# EAGLE board white_line_multi (EAGLE 9.5.1)
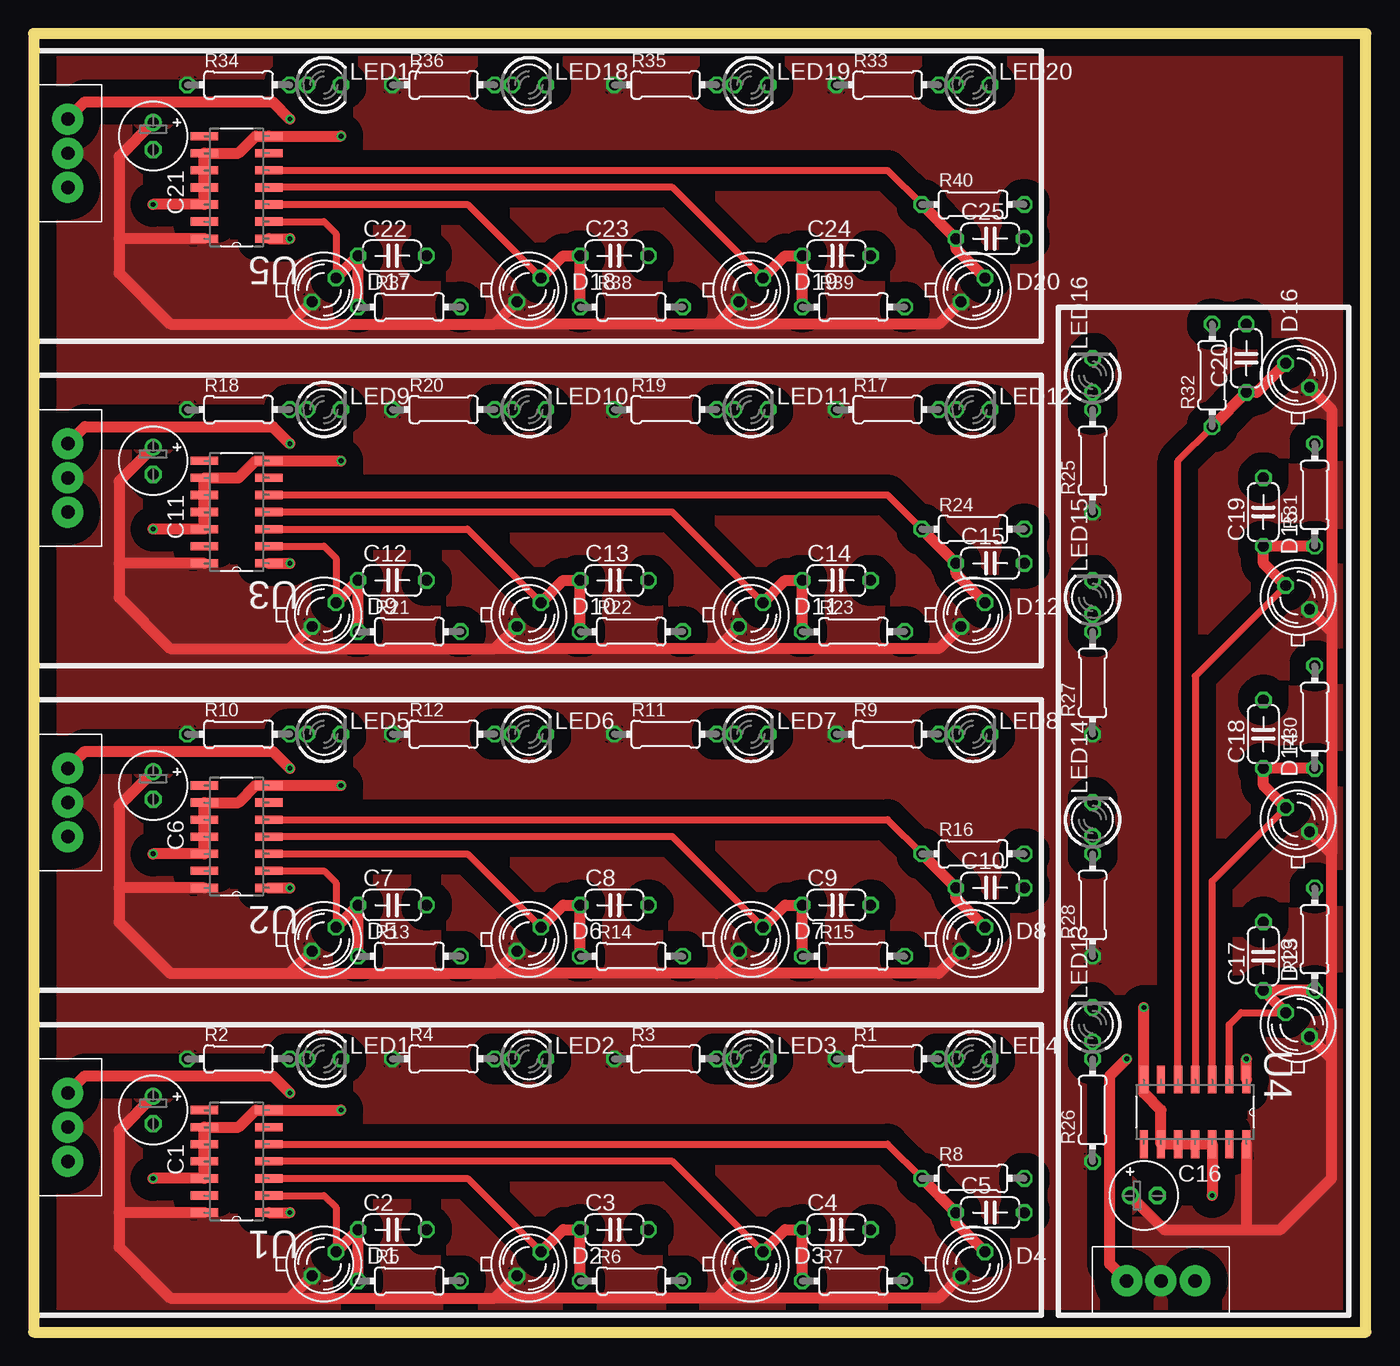
[diagram p0: board, top side]
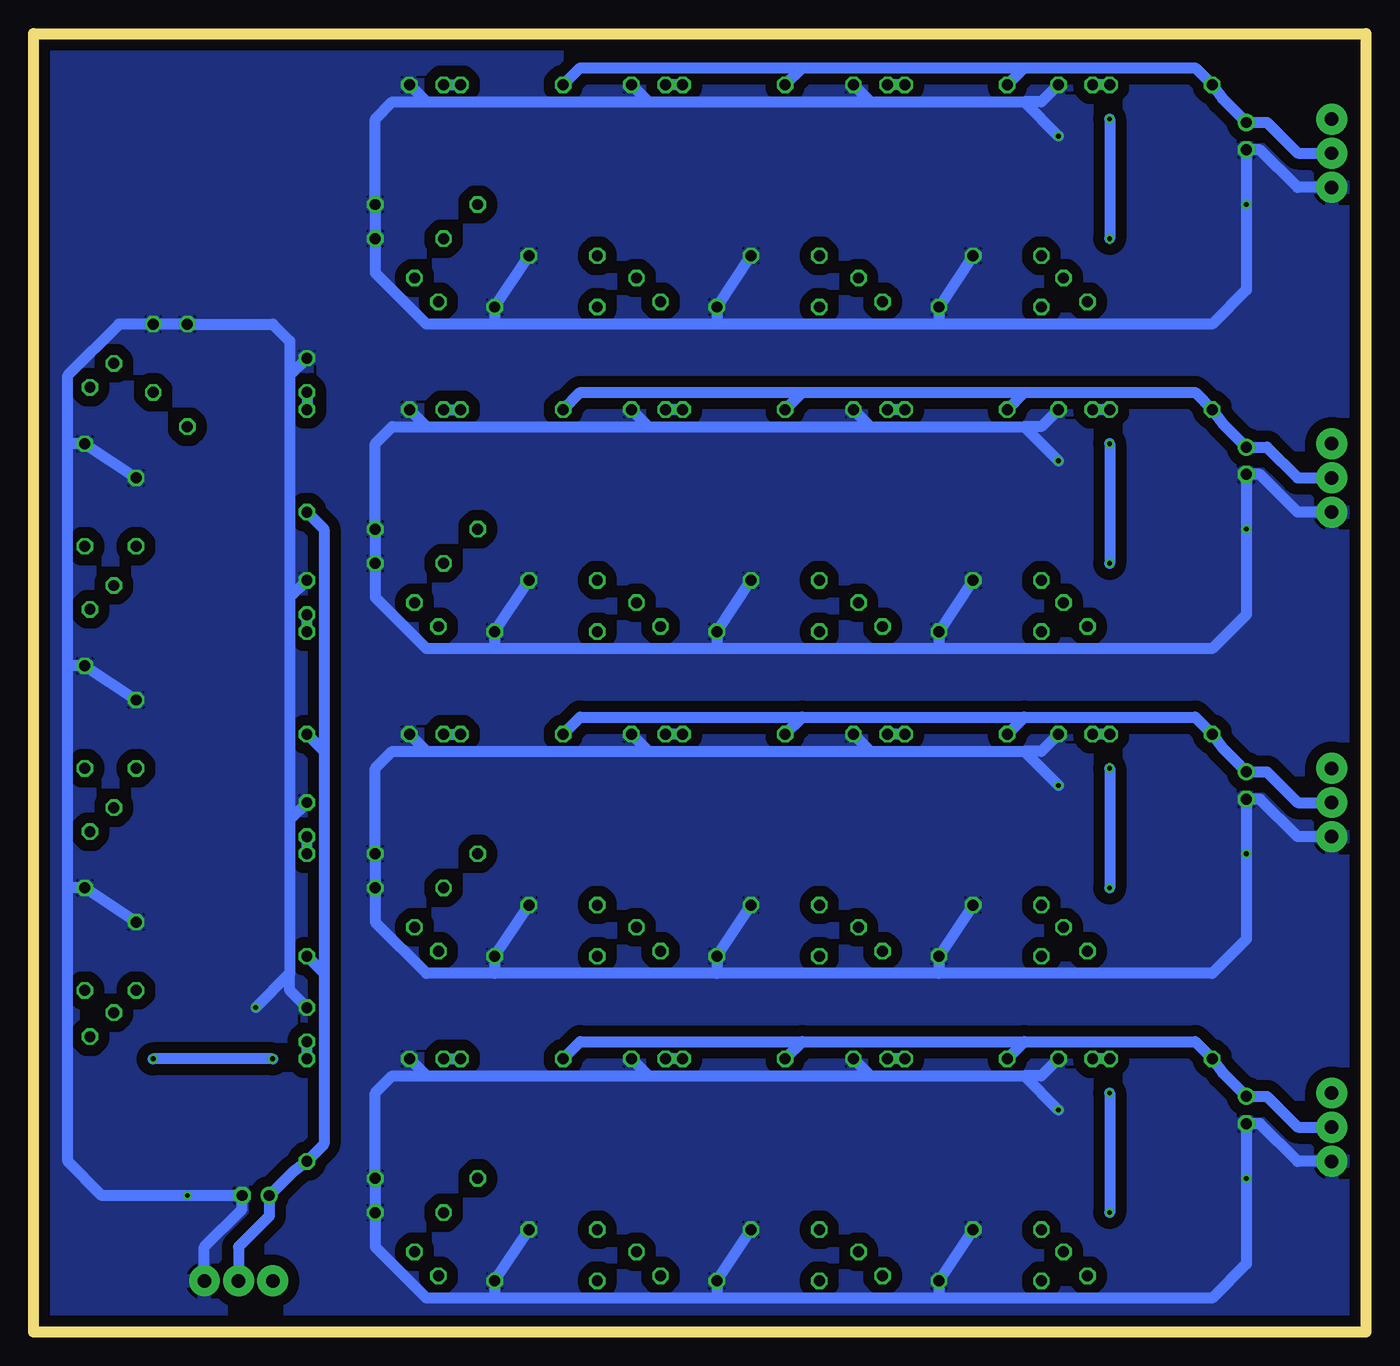
[diagram p1: board, bottom side, seen from below]

Size 99.06 x 96.52 mm. Coordinates in mm from the lower left corner, seen from the top.
Outline: 0,96.52 0,0 99.06,0 99.06,96.52 0,96.52
Copper layers (1*16): Top 0.035mm / dielectric 1.6mm / Bottom 0.035mm
Design rules "Elecrow_2-layer_PCB_eagle_rule": minimum track width 6mil, minimum drill 12mil, track to track 6mil, track to pad 6mil, pad to pad 6mil, via to via 8mil, smd to smd 0mil, copper to edge 20mil, drill to drill 10mil, minimum pad ring 6mil, minimum via ring 6mil, stop-mask expansion 0mil, vias tented up to drill 100mil, thermal gap 10mil

## Footprints (pad centres in the part's own frame; a part is rotated, then mirrored left to right if it is on the bottom)
3PIN = drill 1 pad 2.3: P$1 0,0; P$2 2.54,0; P$3 5.08,0
E2-5 = drill 0.813 pad 1.27: + -1.016,0 | drill 0.813 pad 1.27 octagon: - 1.016,0
C050-024X044 = drill 0.813 octagon: 1 -2.54,0; 2 2.54,0
BPX65 = drill 0.813 octagon: A -0.889,-0.889; K 0.889,0.889
LED3MM = drill 0.813 octagon: A -1.27,0; K 1.27,0
0204/7 = drill 0.813 octagon: 1 -3.81,0; 2 3.81,0
SOIC127P600X175-14N = smd 2.057 x 0.61: 1 -4.801,7.62; 2 -4.801,6.35; 3 -4.801,5.08; 4 -4.801,3.81; 5 -4.801,2.54; 6 -4.801,1.27; 7 -4.801,0; 8 0,0; 9 0,1.27; 10 0,2.54; 11 0,3.81; 12 0,5.08; 13 0,6.35; 14 0,7.62

## Placement (x,y rotation side)
3PIN1  3PIN  [3PIN]  2.54,41.91 270 top
3PIN2  3PIN  [3PIN]  2.54,17.78 270 top
3PIN3  3PIN  [3PIN]  2.54,66.04 270 top
3PIN4  3PIN  [3PIN]  81.28,3.81 0 top
3PIN5  3PIN  [3PIN]  2.54,90.17 270 top
C1  [E2-5]  8.89,16.51 270 top
C2  [C050-024X044]  26.67,7.62 0 top
C3  [C050-024X044]  43.18,7.62 0 top
C4  [C050-024X044]  59.69,7.62 0 top
C5  [C050-024X044]  71.12,8.89 0 top
C6  [E2-5]  8.89,40.64 270 top
C7  [C050-024X044]  26.67,31.75 0 top
C8  [C050-024X044]  43.18,31.75 0 top
C9  [C050-024X044]  59.69,31.75 0 top
C10  [C050-024X044]  71.12,33.02 0 top
C11  [E2-5]  8.89,64.77 270 top
C12  [C050-024X044]  26.67,55.88 0 top
C13  [C050-024X044]  43.18,55.88 0 top
C14  [C050-024X044]  59.69,55.88 0 top
C15  [C050-024X044]  71.12,57.15 0 top
C16  [E2-5]  82.55,10.16 0 top
C17  [C050-024X044]  91.44,27.94 90 top
C18  [C050-024X044]  91.44,44.45 90 top
C19  [C050-024X044]  91.44,60.96 90 top
C20  [C050-024X044]  90.17,72.39 90 top
C21  [E2-5]  8.89,88.9 270 top
C22  [C050-024X044]  26.67,80.01 0 top
C23  [C050-024X044]  43.18,80.01 0 top
C24  [C050-024X044]  59.69,80.01 0 top
C25  [C050-024X044]  71.12,81.28 0 top
D1  BPX65  [BPX65]  21.59,5.08 0 top
D2  BPX65  [BPX65]  36.83,5.08 0 top
D3  BPX65  [BPX65]  53.34,5.08 0 top
D4  BPX65  [BPX65]  69.85,5.08 0 top
D5  BPX65  [BPX65]  21.59,29.21 0 top
D6  BPX65  [BPX65]  36.83,29.21 0 top
D7  BPX65  [BPX65]  53.34,29.21 0 top
D8  BPX65  [BPX65]  69.85,29.21 0 top
D9  BPX65  [BPX65]  21.59,53.34 0 top
D10  BPX65  [BPX65]  36.83,53.34 0 top
D11  BPX65  [BPX65]  53.34,53.34 0 top
D12  BPX65  [BPX65]  69.85,53.34 0 top
D13  BPX65  [BPX65]  93.98,22.86 90 top
D14  BPX65  [BPX65]  93.98,38.1 90 top
D15  BPX65  [BPX65]  93.98,54.61 90 top
D16  BPX65  [BPX65]  93.98,71.12 90 top
D17  BPX65  [BPX65]  21.59,77.47 0 top
D18  BPX65  [BPX65]  36.83,77.47 0 top
D19  BPX65  [BPX65]  53.34,77.47 0 top
D20  BPX65  [BPX65]  69.85,77.47 0 top
LED1  [LED3MM]  21.59,20.32 0 top
LED2  [LED3MM]  36.83,20.32 0 top
LED3  [LED3MM]  53.34,20.32 0 top
LED4  [LED3MM]  69.85,20.32 0 top
LED5  [LED3MM]  21.59,44.45 0 top
LED6  [LED3MM]  36.83,44.45 0 top
LED7  [LED3MM]  53.34,44.45 0 top
LED8  [LED3MM]  69.85,44.45 0 top
LED9  [LED3MM]  21.59,68.58 0 top
LED10  [LED3MM]  36.83,68.58 0 top
LED11  [LED3MM]  53.34,68.58 0 top
LED12  [LED3MM]  69.85,68.58 0 top
LED13  [LED3MM]  78.74,22.86 90 top
LED14  [LED3MM]  78.74,38.1 90 top
LED15  [LED3MM]  78.74,54.61 90 top
LED16  [LED3MM]  78.74,71.12 90 top
LED17  [LED3MM]  21.59,92.71 0 top
LED18  [LED3MM]  36.83,92.71 0 top
LED19  [LED3MM]  53.34,92.71 0 top
LED20  [LED3MM]  69.85,92.71 0 top
R1  [0204/7]  63.5,20.32 0 top
R2  [0204/7]  15.24,20.32 0 top
R3  [0204/7]  46.99,20.32 0 top
R4  [0204/7]  30.48,20.32 0 top
R5  [0204/7]  27.94,3.81 0 top
R6  [0204/7]  44.45,3.81 0 top
R7  [0204/7]  60.96,3.81 0 top
R8  [0204/7]  69.85,11.43 0 top
R9  [0204/7]  63.5,44.45 0 top
R10  [0204/7]  15.24,44.45 0 top
R11  [0204/7]  46.99,44.45 0 top
R12  [0204/7]  30.48,44.45 0 top
R13  [0204/7]  27.94,27.94 0 top
R14  [0204/7]  44.45,27.94 0 top
R15  [0204/7]  60.96,27.94 0 top
R16  [0204/7]  69.85,35.56 0 top
R17  [0204/7]  63.5,68.58 0 top
R18  [0204/7]  15.24,68.58 0 top
R19  [0204/7]  46.99,68.58 0 top
R20  [0204/7]  30.48,68.58 0 top
R21  [0204/7]  27.94,52.07 0 top
R22  [0204/7]  44.45,52.07 0 top
R23  [0204/7]  60.96,52.07 0 top
R24  [0204/7]  69.85,59.69 0 top
R25  [0204/7]  78.74,64.77 90 top
R26  [0204/7]  78.74,16.51 90 top
R27  [0204/7]  78.74,48.26 90 top
R28  [0204/7]  78.74,31.75 90 top
R29  [0204/7]  95.25,29.21 90 top
R30  [0204/7]  95.25,45.72 90 top
R31  [0204/7]  95.25,62.23 90 top
R32  [0204/7]  87.63,71.12 90 top
R33  [0204/7]  63.5,92.71 0 top
R34  [0204/7]  15.24,92.71 0 top
R35  [0204/7]  46.99,92.71 0 top
R36  [0204/7]  30.48,92.71 0 top
R37  [0204/7]  27.94,76.2 0 top
R38  [0204/7]  44.45,76.2 0 top
R39  [0204/7]  60.96,76.2 0 top
R40  [0204/7]  69.85,83.82 0 top
U1  CD4072BM  [SOIC127P600X175-14N]  12.7,16.51 180 top
U2  CD4072BM  [SOIC127P600X175-14N]  12.7,40.64 180 top
U3  CD4072BM  [SOIC127P600X175-14N]  12.7,64.77 180 top
U4  CD4072BM  [SOIC127P600X175-14N]  82.55,13.97 270 top
U5  CD4072BM  [SOIC127P600X175-14N]  12.7,88.9 180 top

## Library data of the parts
3PIN1-3PIN5 = 3PIN_2
C1-C25 = rcl; SPICEPREFIX: C
D1-D20 = opto-trans-siemens; MPN: BPX65.; OC_FARNELL: 327451; OC_NEWARK: 06WX2764
LED1-LED20 = led
R1-R40 = rcl; SPICEPREFIX: R
U1-U5 = CD4072BM; AVAILABILITY: Unavailable; DESCRIPTION: CMOS Dual 4-Input OR Gate 14-SOIC -55 to 125; MF: Texas Instruments; MP: CD4072BM; PACKAGE: SOIC-14 Texas Instruments; PRICE: None

## Nets
A: C2.1 D1.K R5.1 U1.2
A1: C7.1 D5.K R13.1 U2.2
A2: C12.1 D9.K R21.1 U3.2
A3: C17.1 D13.K R29.1 U4.2
A4: C22.1 D17.K R37.1 U5.2
B: C3.1 D2.K R6.1 U1.3
B1: C8.1 D6.K R14.1 U2.3
B2: C13.1 D10.K R22.1 U3.3
B3: C18.1 D14.K R30.1 U4.3
B4: C23.1 D18.K R38.1 U5.3
C: C4.1 D3.K R7.1 U1.4
C1: C9.1 D7.K R15.1 U2.4
C2: C14.1 D11.K R23.1 U3.4
C3: C19.1 D15.K R31.1 U4.4
C4: C24.1 D19.K R39.1 U5.4
D: C5.1 D4.K R8.1 U1.5
D1: C10.1 D8.K R16.1 U2.5
D2: C15.1 D12.K R24.1 U3.5
D3: C20.1 D16.K R32.1 U4.5
D4: C25.1 D20.K R40.1 U5.5
GND: 3PIN1.P$3 3PIN2.P$3 3PIN3.P$3 3PIN4.P$3 3PIN5.P$3 C1.- C2.2 C3.2 C4.2 C5.2 C6.- C7.2 C8.2 C9.2 C10.2 C11.- C12.2 C13.2 C14.2 C15.2 C16.- C17.2 C18.2 C19.2 C20.2 C21.- C22.2 C23.2 C24.2 C25.2 LED1.K LED2.K LED3.K LED4.K LED5.K LED6.K LED7.K LED8.K LED9.K LED10.K LED11.K LED12.K LED13.K LED14.K LED15.K LED16.K LED17.K LED18.K LED19.K LED20.K R5.2 R6.2 R7.2 R8.2 R13.2 R14.2 R15.2 R16.2 R21.2 R22.2 R23.2 R24.2 R29.2 R30.2 R31.2 R32.2 R37.2 R38.2 R39.2 R40.2 U1.7 U1.9 U1.10 U1.11 U1.12 U2.7 U2.9 U2.10 U2.11 U2.12 U3.7 U3.9 U3.10 U3.11 U3.12 U4.7 U4.9 U4.10 U4.11 U4.12 U5.7 U5.9 U5.10 U5.11 U5.12
N$1: LED4.A R1.2
N$2: LED1.A R2.2
N$3: LED3.A R3.2
N$4: LED2.A R4.2
N$5: LED8.A R9.2
N$6: LED5.A R10.2
N$7: LED7.A R11.2
N$8: LED6.A R12.2
N$9: LED12.A R17.2
N$10: LED9.A R18.2
N$11: LED11.A R19.2
N$12: LED10.A R20.2
N$13: LED16.A R25.2
N$14: LED13.A R26.2
N$15: LED15.A R27.2
N$16: LED14.A R28.2
N$17: LED20.A R33.2
N$18: LED17.A R34.2
N$19: LED19.A R35.2
N$20: LED18.A R36.2
OUT: 3PIN2.P$1 U1.1
OUT1: 3PIN1.P$1 U2.1
OUT2: 3PIN3.P$1 U3.1
OUT3: 3PIN4.P$1 U4.1
OUT4: 3PIN5.P$1 U5.1
VCC: 3PIN1.P$2 3PIN2.P$2 3PIN3.P$2 3PIN4.P$2 3PIN5.P$2 C1.+ C6.+ C11.+ C16.+ C21.+ D1.A D2.A D3.A D4.A D5.A D6.A D7.A D8.A D9.A D10.A D11.A D12.A D13.A D14.A D15.A D16.A D17.A D18.A D19.A D20.A R1.1 R2.1 R3.1 R4.1 R9.1 R10.1 R11.1 R12.1 R17.1 R18.1 R19.1 R20.1 R25.1 R26.1 R27.1 R28.1 R33.1 R34.1 R35.1 R36.1 U1.14 U2.14 U3.14 U4.14 U5.14

## Tracks (layer width: path | path; a pad name or v marks a point on that pad's centre or on a via)
A
  Top 0.508: U1.2 21.59,10.16 22.48,9.27 D1.K
  Top 0.813: R5.1 C2.1 D1.K
A1
  Top 0.508: U2.2 21.59,34.29 22.48,33.4 D5.K
  Top 0.813: R13.1 C7.1 D5.K
A2
  Top 0.508: U3.2 21.59,58.42 22.48,57.53 D9.K
  Top 0.813: R21.1 C12.1 D9.K
A3
  Top 0.508: U4.2 88.9,22.86 89.79,23.75 D13.K
  Top 0.813: R29.1 C17.1 D13.K
A4
  Top 0.508: U5.2 21.59,82.55 22.48,81.66 D17.K
  Top 0.813: R37.1 C22.1 D17.K
B
  Top 0.508: D2.K 32.26,11.43 U1.3
  Top 0.813: R6.1 C3.1 39.37,7.62 D2.K
B1
  Top 0.508: D6.K 32.26,35.56 U2.3
  Top 0.813: R14.1 C8.1 39.37,31.75 D6.K
B2
  Top 0.508: D10.K 32.26,59.69 U3.3
  Top 0.813: R22.1 C13.1 39.37,55.88 D10.K
B3
  Top 0.508: D14.K 87.63,33.53 U4.3
  Top 0.813: R30.1 C18.1 91.44,40.64 D14.K
B4
  Top 0.508: D18.K 32.26,83.82 U5.3
  Top 0.813: R38.1 C23.1 39.37,80.01 D18.K
C
  Top 0.508: D3.K 47.5,12.7 U1.4
  Top 0.813: R7.1 C4.1 55.88,7.62 D3.K
C1
  Top 0.508: D7.K 47.5,36.83 U2.4
  Top 0.813: R15.1 C9.1 55.88,31.75 D7.K
C2
  Top 0.508: D11.K 47.5,60.96 U3.4
  Top 0.813: R23.1 C14.1 55.88,55.88 D11.K
C3
  Top 0.508: D15.K 86.36,48.77 U4.4
  Top 0.813: R31.1 C19.1 91.44,57.15 D15.K
C4
  Top 0.508: D19.K 47.5,85.09 U5.4
  Top 0.813: R39.1 C24.1 55.88,80.01 D19.K
D
  Top 0.508: R8.1 63.5,13.97 U1.5
  Top 0.813: D4.K 68.58,8.13 C5.1 R8.1
D1
  Top 0.508: R16.1 63.5,38.1 U2.5
  Top 0.813: D8.K 68.58,32.26 C10.1 R16.1
D2
  Top 0.508: R24.1 63.5,62.23 U3.5
  Top 0.813: D12.K 68.58,56.39 C15.1 R24.1
D3
  Top 0.508: R32.1 85.09,64.77 U4.5
  Top 0.813: D16.K 90.93,69.85 C20.1 R32.1
D4
  Top 0.508: R40.1 63.5,86.36 U5.5
  Top 0.813: D20.K 68.58,80.52 C25.1 R40.1
GND  (via drill 0.35)
  Top 0.813: v8.89,11.43 U1.12 U1.11 U1.10 U1.9 15.24,15.24 16.51,16.51 U1.7 v22.86,16.51 | v8.89,35.56 U2.12 U2.11 U2.10 U2.9 15.24,39.37 16.51,40.64 U2.7 v22.86,40.64 | v8.89,59.69 U3.12 U3.11 U3.10 U3.9 15.24,63.5 16.51,64.77 U3.7 v22.86,64.77 | v8.89,83.82 U5.12 U5.11 U5.10 U5.9 15.24,87.63 16.51,88.9 U5.7 v22.86,88.9 | v87.63,10.16 U4.12 U4.11 U4.10 U4.9 83.82,16.51 82.55,17.78 U4.7 v82.55,24.13
  Bottom 0.813: LED4.K 69.85,19.05 | 69.85,19.05 53.34,19.05 | 53.34,19.05 36.83,19.05 | 36.83,19.05 25.4,19.05 | LED2.K 36.83,19.05 | LED3.K 53.34,19.05 | 3PIN2.P$3 5.08,12.7 7.87,15.49 C1.- v8.89,11.43 8.89,5.08 11.43,2.54 31.75,2.54 | C4.2 R7.2 64.77,2.54 | C3.2 R6.2 48.26,2.54 | v22.86,16.51 25.4,19.05 | LED1.K 24.13,19.05 25.4,19.05 | 31.75,2.54 48.26,2.54 | 48.26,2.54 64.77,2.54 | 64.77,2.54 69.85,2.54 73.66,6.35 C5.2 R8.2 73.66,17.78 72.39,19.05 69.85,19.05 | C2.2 R5.2 31.75,2.54 | LED8.K 69.85,43.18 | 69.85,43.18 53.34,43.18 | 53.34,43.18 36.83,43.18 | 36.83,43.18 25.4,43.18 | LED6.K 36.83,43.18 | LED7.K 53.34,43.18 | 3PIN1.P$3 5.08,36.83 7.87,39.62 C6.- v8.89,35.56 8.89,29.21 11.43,26.67 31.75,26.67 | C9.2 R15.2 64.77,26.67 | C8.2 R14.2 48.26,26.67 | v22.86,40.64 25.4,43.18 | LED5.K 24.13,43.18 25.4,43.18 | 31.75,26.67 48.26,26.67 | 48.26,26.67 64.77,26.67 | 64.77,26.67 69.85,26.67 73.66,30.48 C10.2 R16.2 73.66,41.91 72.39,43.18 69.85,43.18 | C7.2 R13.2 31.75,26.67 | LED12.K 69.85,67.31 | 69.85,67.31 53.34,67.31 | 53.34,67.31 36.83,67.31 | 36.83,67.31 25.4,67.31 | LED10.K 36.83,67.31 | LED11.K 53.34,67.31 | 3PIN3.P$3 5.08,60.96 7.87,63.75 C11.- v8.89,59.69 8.89,53.34 11.43,50.8 31.75,50.8 | C14.2 R23.2 64.77,50.8 | C13.2 R22.2 48.26,50.8 | v22.86,64.77 25.4,67.31 | LED9.K 24.13,67.31 25.4,67.31 | 31.75,50.8 48.26,50.8 | 48.26,50.8 64.77,50.8 | 64.77,50.8 69.85,50.8 73.66,54.61 C15.2 R24.2 73.66,66.04 72.39,67.31 69.85,67.31 | C12.2 R21.2 31.75,50.8 | LED20.K 69.85,91.44 | 69.85,91.44 53.34,91.44 | 53.34,91.44 36.83,91.44 | 36.83,91.44 25.4,91.44 | LED18.K 36.83,91.44 | LED19.K 53.34,91.44 | 3PIN5.P$3 5.08,85.09 7.87,87.88 C21.- v8.89,83.82 8.89,77.47 11.43,74.93 31.75,74.93
  Bottom 0.813: C24.2 R39.2 64.77,74.93 | C23.2 R38.2 48.26,74.93 | v22.86,88.9 25.4,91.44 | LED17.K 24.13,91.44 25.4,91.44 | 31.75,74.93 48.26,74.93 | 48.26,74.93 64.77,74.93 | 64.77,74.93 69.85,74.93 73.66,78.74 C25.2 R40.2 73.66,90.17 72.39,91.44 69.85,91.44 | C22.2 R37.2 31.75,74.93 | LED16.K 80.01,71.12 | 80.01,71.12 80.01,54.61 | 80.01,54.61 80.01,38.1 | 80.01,38.1 80.01,26.67 | LED14.K 80.01,38.1 | LED15.K 80.01,54.61 | 3PIN4.P$3 86.36,6.35 83.57,9.14 C16.- v87.63,10.16 93.98,10.16 96.52,12.7 96.52,33.02 | C19.2 R31.2 96.52,66.04 | C18.2 R30.2 96.52,49.53 | v82.55,24.13 80.01,26.67 | LED13.K 80.01,25.4 80.01,26.67 | 96.52,33.02 96.52,49.53 | 96.52,49.53 96.52,66.04 | 96.52,66.04 96.52,71.12 92.71,74.93 C20.2 R32.2 81.28,74.93 80.01,73.66 80.01,71.12 | C17.2 R29.2 96.52,33.02
  pour Bottom (isolate 0.813): 0,0 99.06,0 99.06,96.52 0,96.52
N$1
  Bottom 0.813: LED4.A R1.2
N$2
  Bottom 0.813: R2.2 LED1.A
N$3
  Bottom 0.813: R3.2 LED3.A
N$4
  Bottom 0.813: R4.2 LED2.A
N$5
  Bottom 0.813: LED8.A R9.2
N$6
  Bottom 0.813: R10.2 LED5.A
N$7
  Bottom 0.813: R11.2 LED7.A
N$8
  Bottom 0.813: R12.2 LED6.A
N$9
  Bottom 0.813: LED12.A R17.2
N$10
  Bottom 0.813: R18.2 LED9.A
N$11
  Bottom 0.813: R19.2 LED11.A
N$12
  Bottom 0.813: R20.2 LED10.A
N$13
  Bottom 0.813: LED16.A R25.2
N$14
  Bottom 0.813: R26.2 LED13.A
N$15
  Bottom 0.813: R27.2 LED15.A
N$16
  Bottom 0.813: R28.2 LED14.A
N$17
  Bottom 0.813: LED20.A R33.2
N$18
  Bottom 0.813: R34.2 LED17.A
N$19
  Bottom 0.813: R35.2 LED19.A
N$20
  Bottom 0.813: R36.2 LED18.A
OUT  (via drill 0.35)
  Top 0.813: 3PIN2.P$1 3.81,19.05 17.78,19.05 v19.05,17.78 | U1.1 v19.05,8.89
  Bottom 0.813: v19.05,17.78 v19.05,8.89
OUT1  (via drill 0.35)
  Top 0.813: 3PIN1.P$1 3.81,43.18 17.78,43.18 v19.05,41.91 | U2.1 v19.05,33.02
  Bottom 0.813: v19.05,41.91 v19.05,33.02
OUT2  (via drill 0.35)
  Top 0.813: 3PIN3.P$1 3.81,67.31 17.78,67.31 v19.05,66.04 | U3.1 v19.05,57.15
  Bottom 0.813: v19.05,66.04 v19.05,57.15
OUT3  (via drill 0.35)
  Top 0.813: 3PIN4.P$1 80.01,5.08 80.01,19.05 v81.28,20.32 | U4.1 v90.17,20.32
  Bottom 0.813: v81.28,20.32 v90.17,20.32
OUT4  (via drill 0.35)
  Top 0.813: 3PIN5.P$1 3.81,91.44 17.78,91.44 v19.05,90.17 | U5.1 v19.05,81.28
  Bottom 0.813: v19.05,90.17 v19.05,81.28
VCC
  Top 0.813: D4.A 67.31,2.54 50.8,2.54 | 50.8,2.54 34.29,2.54 | D3.A 50.8,2.54 | D2.A 34.29,2.54 | D1.A 19.05,2.54 | 6.35,8.89 6.35,6.35 10.16,2.54 19.05,2.54 | U1.14 6.35,8.89 | C1.+ 6.35,14.99 6.35,8.89 | 19.05,2.54 34.29,2.54 | D20.A 67.31,74.93 50.8,74.93 | 50.8,74.93 34.29,74.93 | D19.A 50.8,74.93 | D18.A 34.29,74.93 | D17.A 19.05,74.93 | 6.35,81.28 6.35,78.74 10.16,74.93 19.05,74.93 | U5.14 6.35,81.28 | C21.+ 6.35,87.38 6.35,81.28 | 19.05,74.93 34.29,74.93 | D12.A 67.31,50.8 50.8,50.8 | 50.8,50.8 34.29,50.8 | D11.A 50.8,50.8 | D10.A 34.29,50.8 | D9.A 19.05,50.8 | 6.35,57.15 6.35,54.61 10.16,50.8 19.05,50.8 | U3.14 6.35,57.15 | C11.+ 6.35,63.25 6.35,57.15 | 19.05,50.8 34.29,50.8 | D8.A 67.31,26.67 50.8,26.67 | 50.8,26.67 34.29,26.67 | D7.A 50.8,26.67 | D6.A 34.29,26.67 | D5.A 19.05,26.67 | 6.35,33.02 6.35,30.48 10.16,26.67 19.05,26.67 | U2.14 6.35,33.02 | C6.+ 6.35,39.12 6.35,33.02 | 19.05,26.67 34.29,26.67 | D16.A 96.52,68.58 96.52,52.07 | 96.52,52.07 96.52,35.56 | D15.A 96.52,52.07 | D14.A 96.52,35.56 | D13.A 96.52,20.32 | 90.17,7.62 92.71,7.62 96.52,11.43 96.52,20.32 | U4.14 90.17,7.62 | C16.+ 84.07,7.62 90.17,7.62 | 96.52,20.32 96.52,35.56
  Bottom 0.813: R1.1 58.42,21.59 41.91,21.59 | 41.91,21.59 25.4,21.59 | 25.4,21.59 12.7,21.59 R2.1 10.64,19.28 C1.+ 7.37,17.53 5.08,15.24 3PIN2.P$2 | R4.1 25.4,21.59 | R3.1 41.91,21.59 | R33.1 58.42,93.98 41.91,93.98 | 41.91,93.98 25.4,93.98 | 25.4,93.98 12.7,93.98 R34.1 10.64,91.67 C21.+ 7.37,89.92 5.08,87.63 3PIN5.P$2 | R36.1 25.4,93.98 | R35.1 41.91,93.98 | R17.1 58.42,69.85 41.91,69.85 | 41.91,69.85 25.4,69.85 | 25.4,69.85 12.7,69.85 R18.1 10.64,67.54 C11.+ 7.37,65.79 5.08,63.5 3PIN3.P$2 | R20.1 25.4,69.85 | R19.1 41.91,69.85 | R9.1 58.42,45.72 41.91,45.72 | 41.91,45.72 25.4,45.72 | 25.4,45.72 12.7,45.72 R10.1 10.64,43.41 C6.+ 7.37,41.66 5.08,39.37 3PIN1.P$2 | R12.1 25.4,45.72 | R11.1 41.91,45.72 | R25.1 77.47,59.69 77.47,43.18 | 77.47,43.18 77.47,26.67 | 77.47,26.67 77.47,13.97 R26.1 79.78,11.91 C16.+ 81.53,8.64 83.82,6.35 3PIN4.P$2 | R28.1 77.47,26.67 | R27.1 77.47,43.18
  pour Top (isolate 1.27): 0,0 99.06,0 99.06,96.52 0,96.52